# Altium PCB PCB1.PcbDoc
Units mm, origin at the board's own origin, x right, y up, seen from the top; angles counter-clockwise.
Board outline 43.18 x 56.78 mm, 4 copper layers (Top Layer, GND, VCC, Bottom Layer), stack 0.603 mm thick; 39 components, 39 nets, 158 pads, 64 vias.
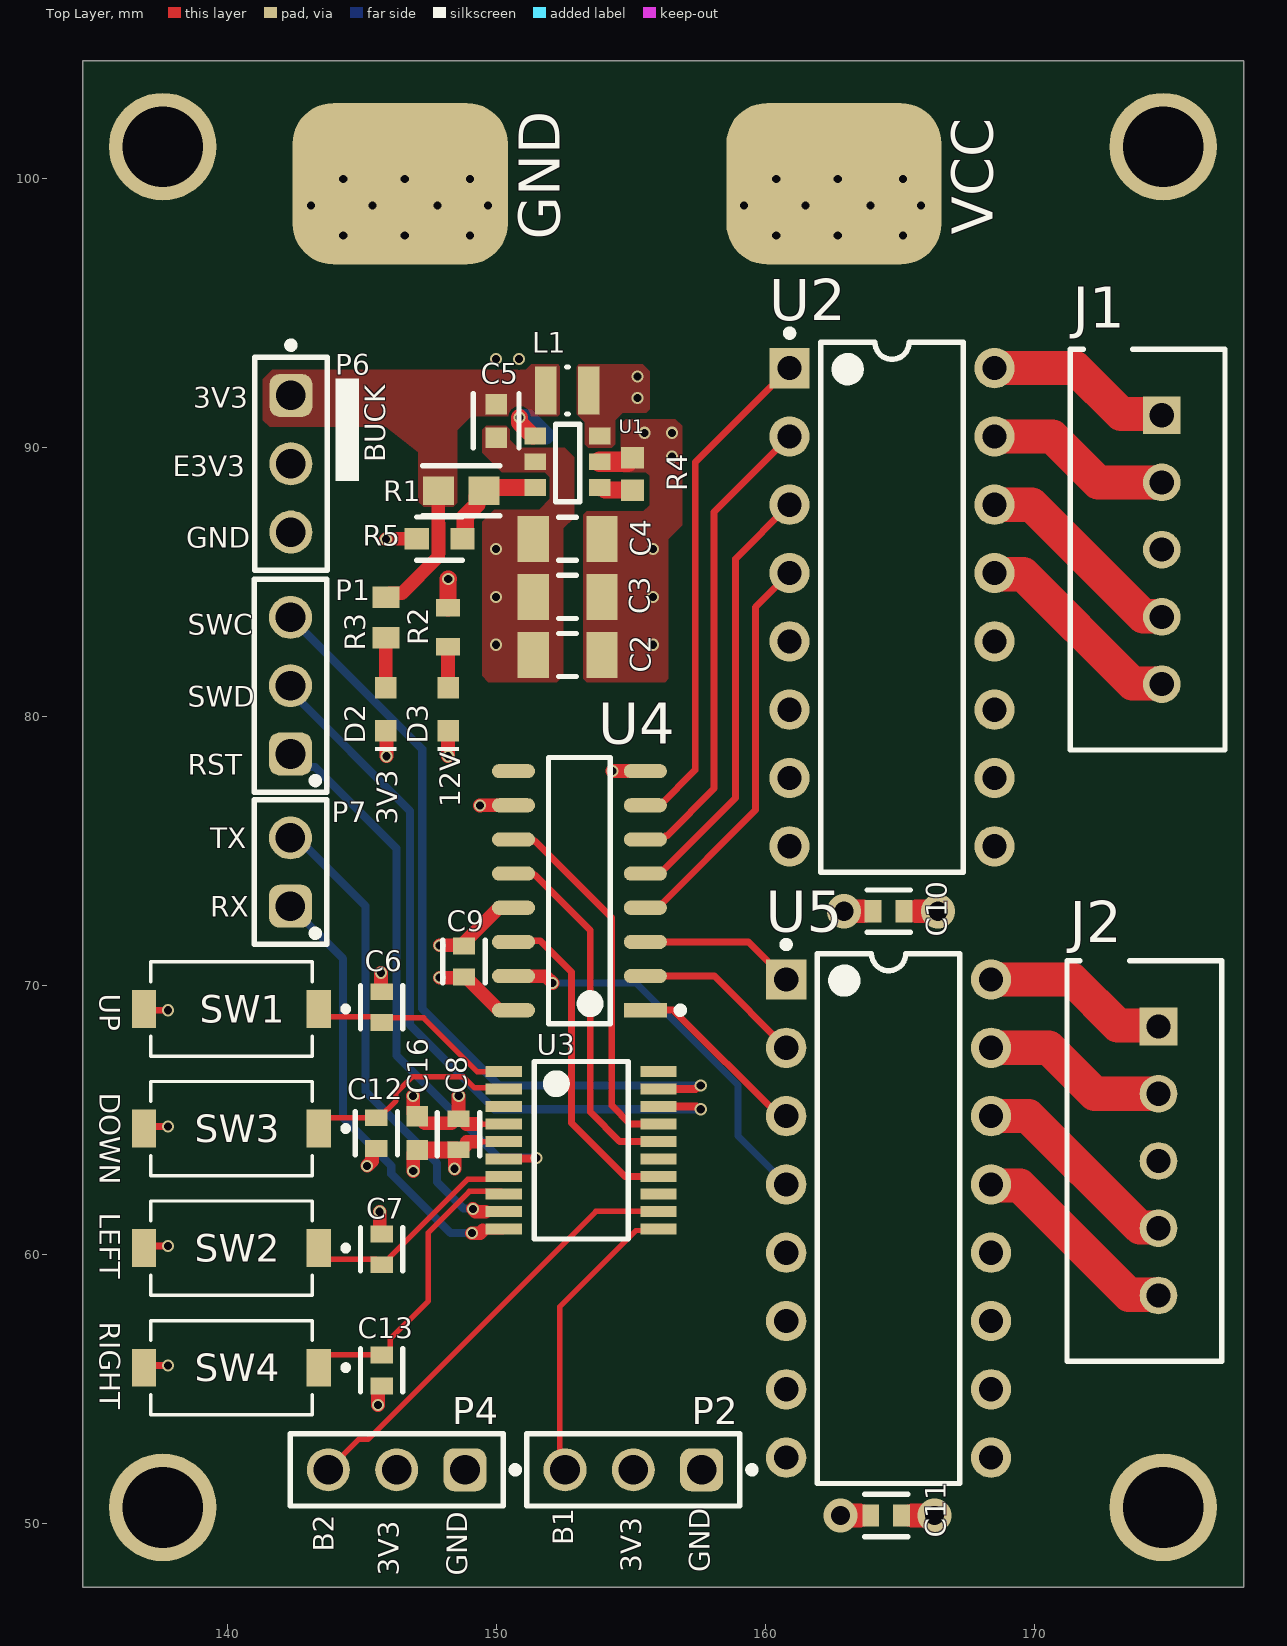
[diagram p0: Top Layer view]
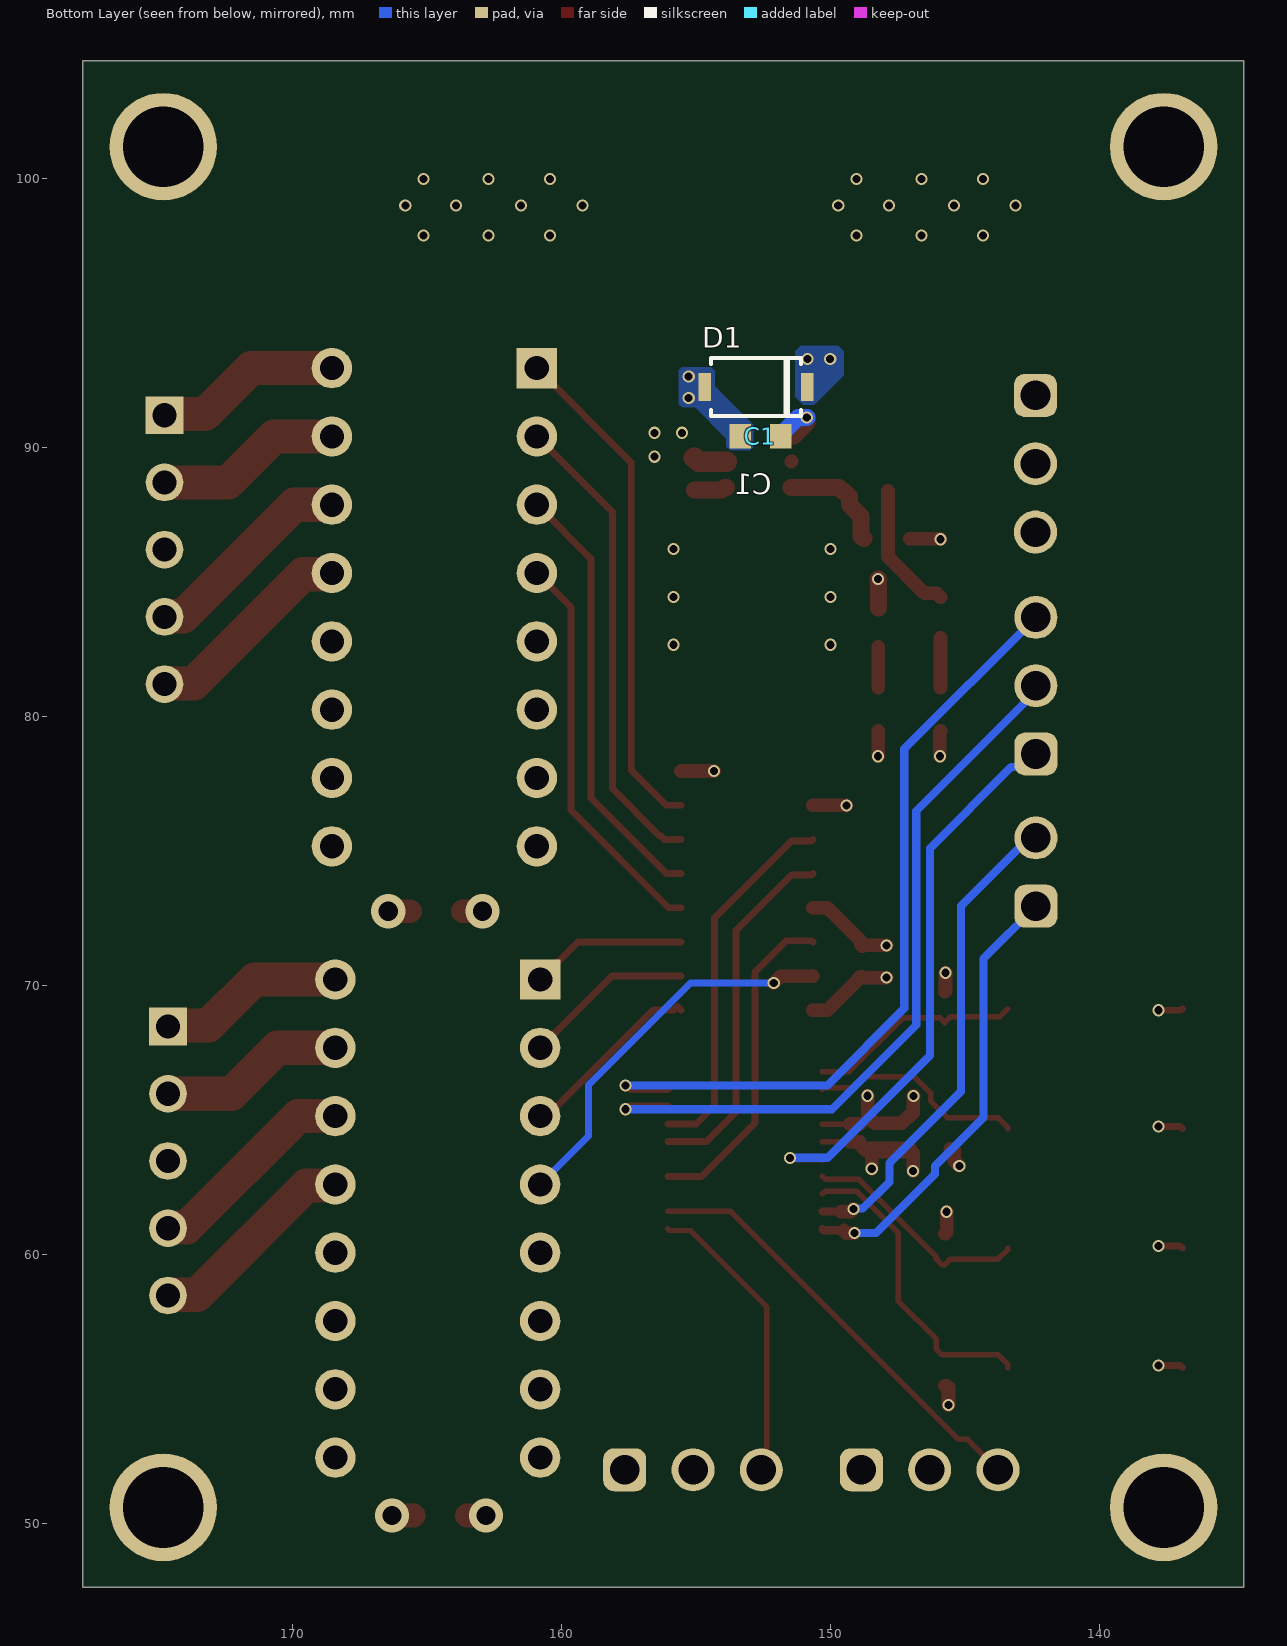
[diagram p1: Bottom Layer view, seen from below]
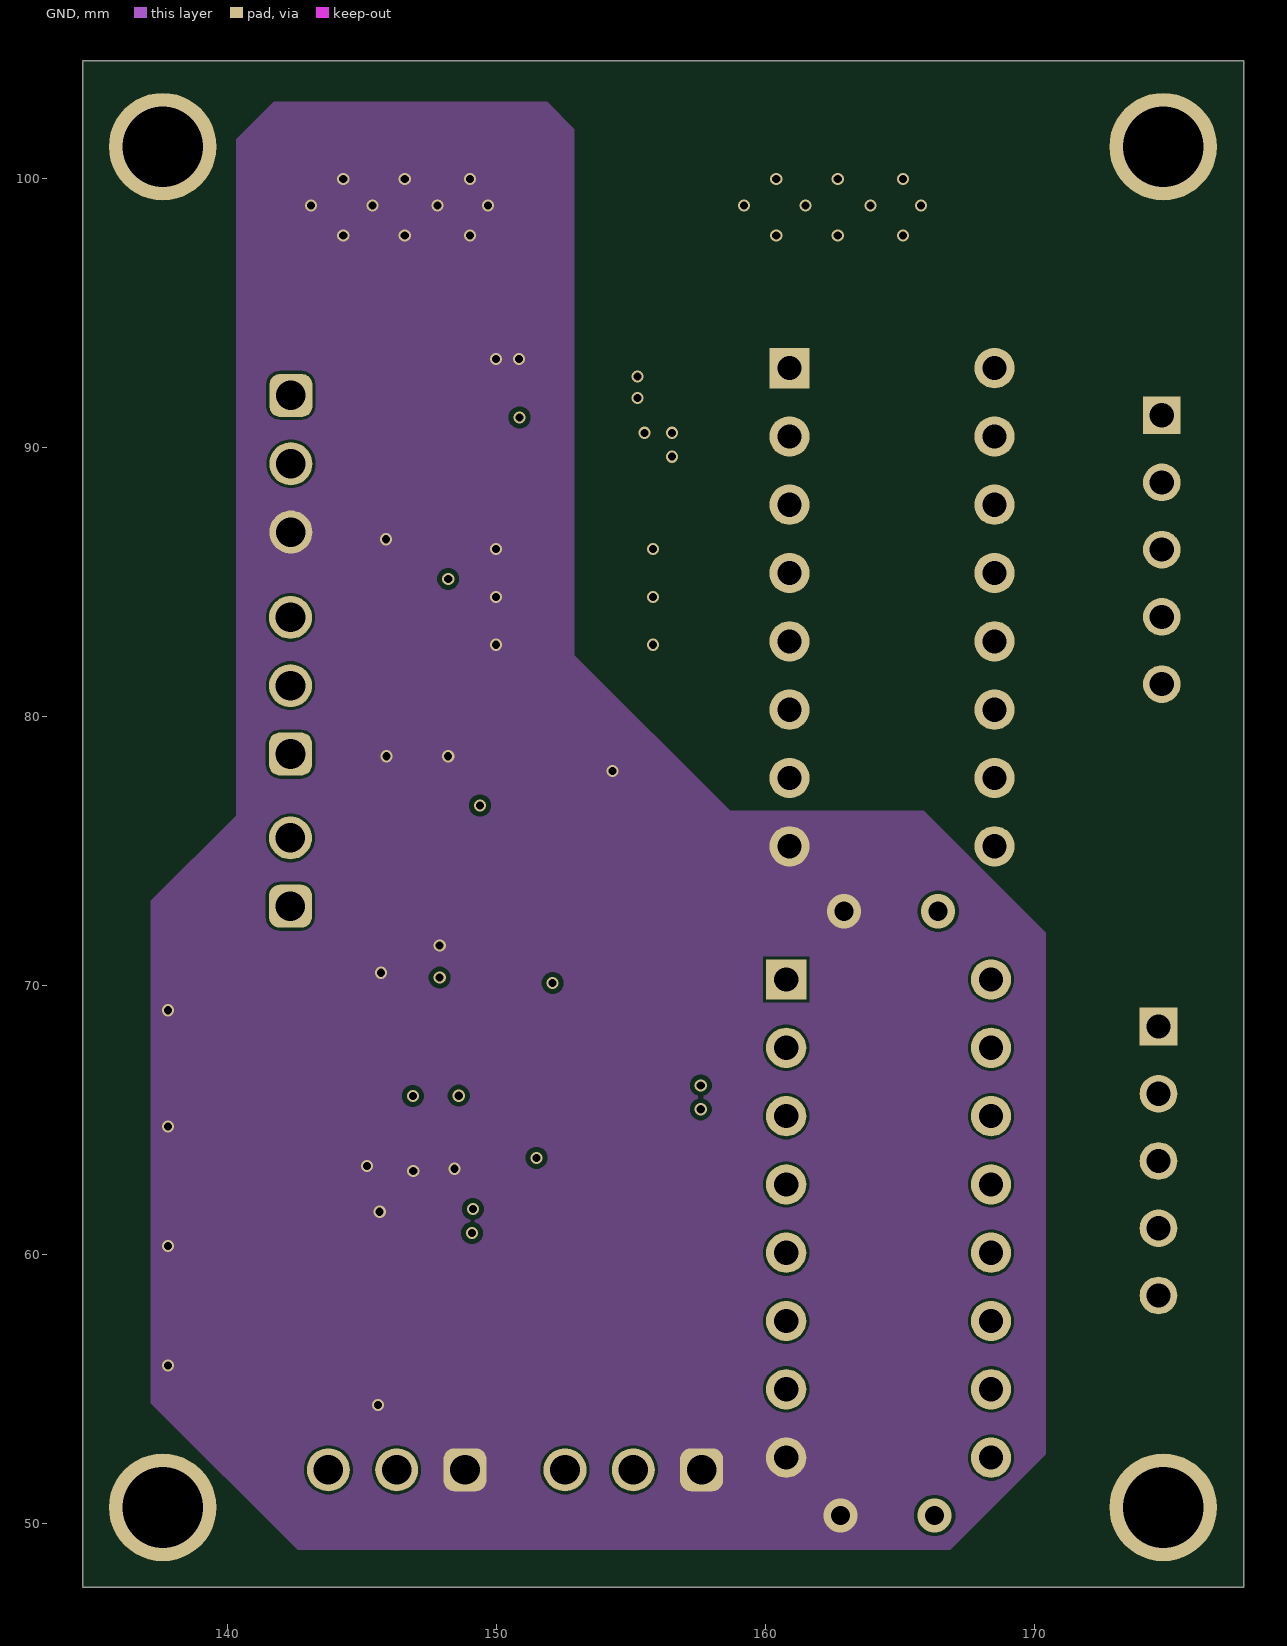
[diagram p2: GND]
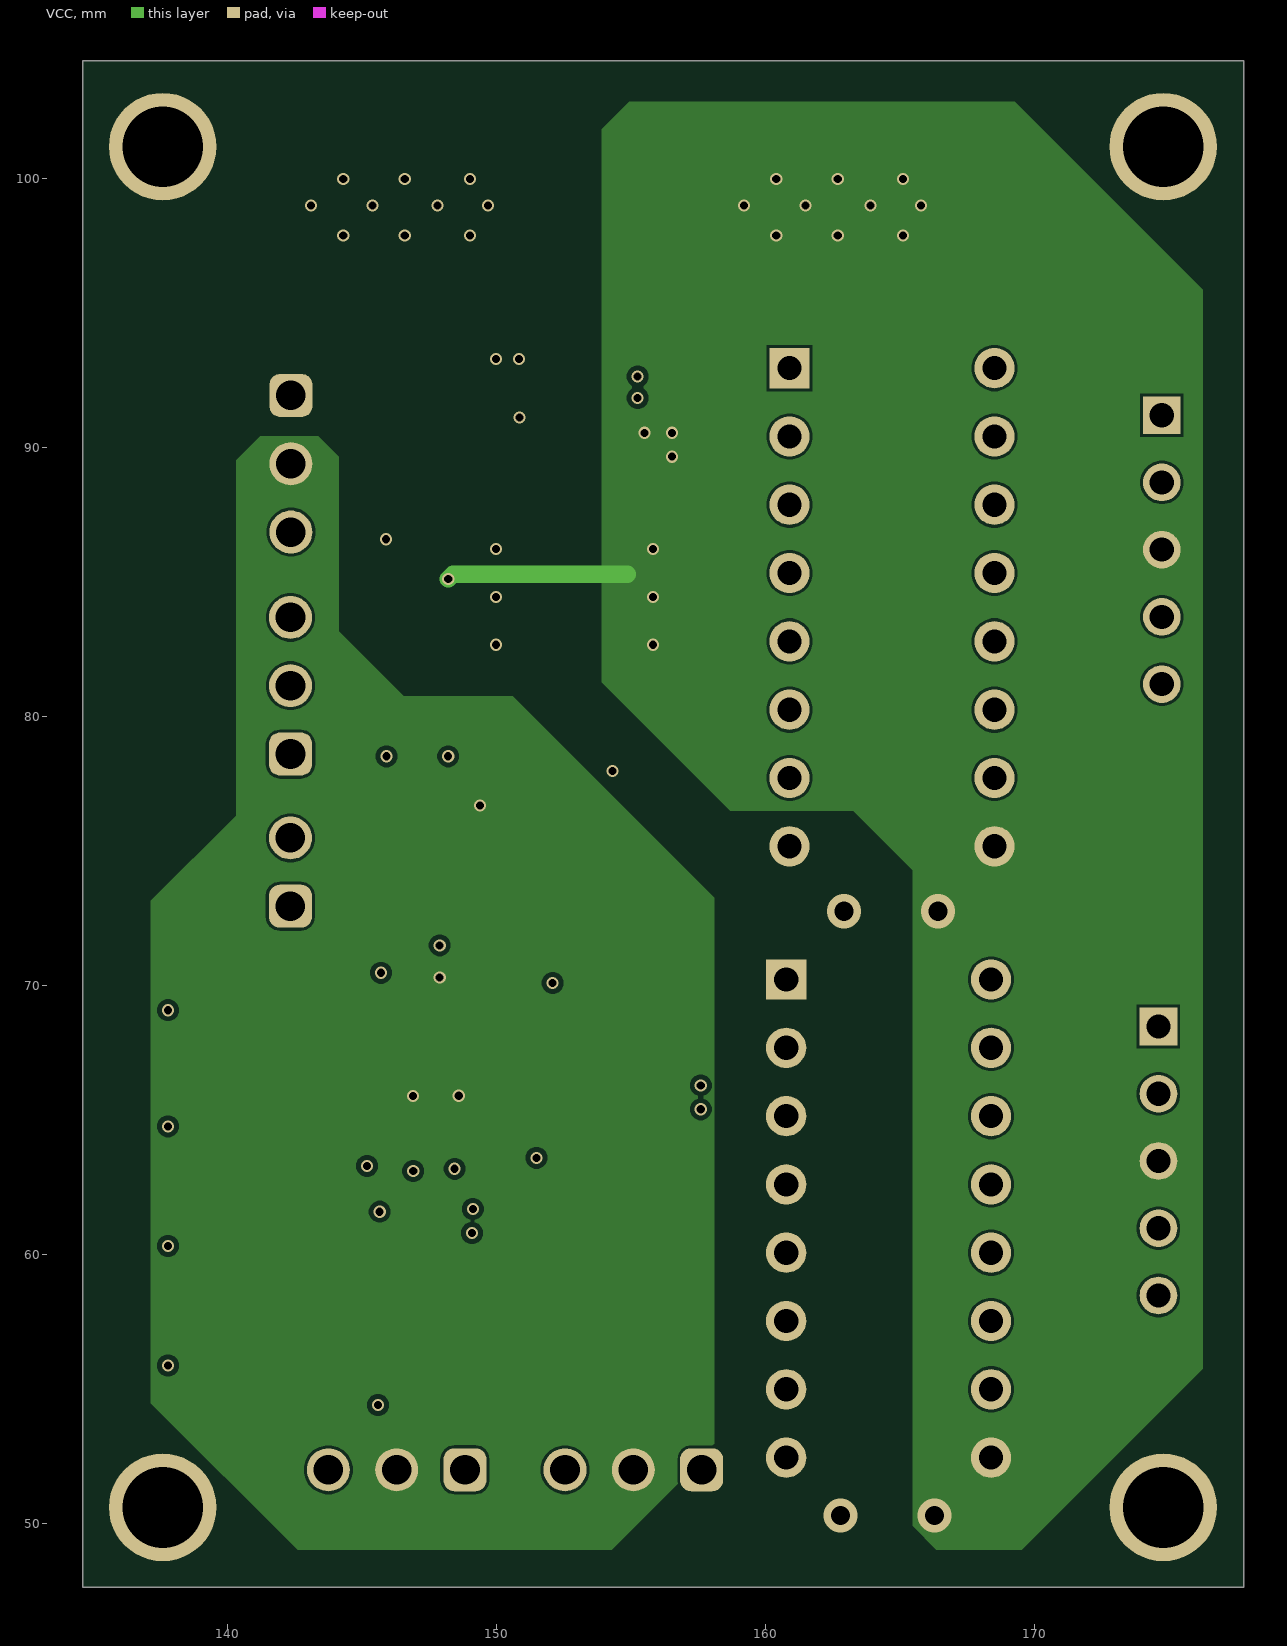
[diagram p3: VCC]
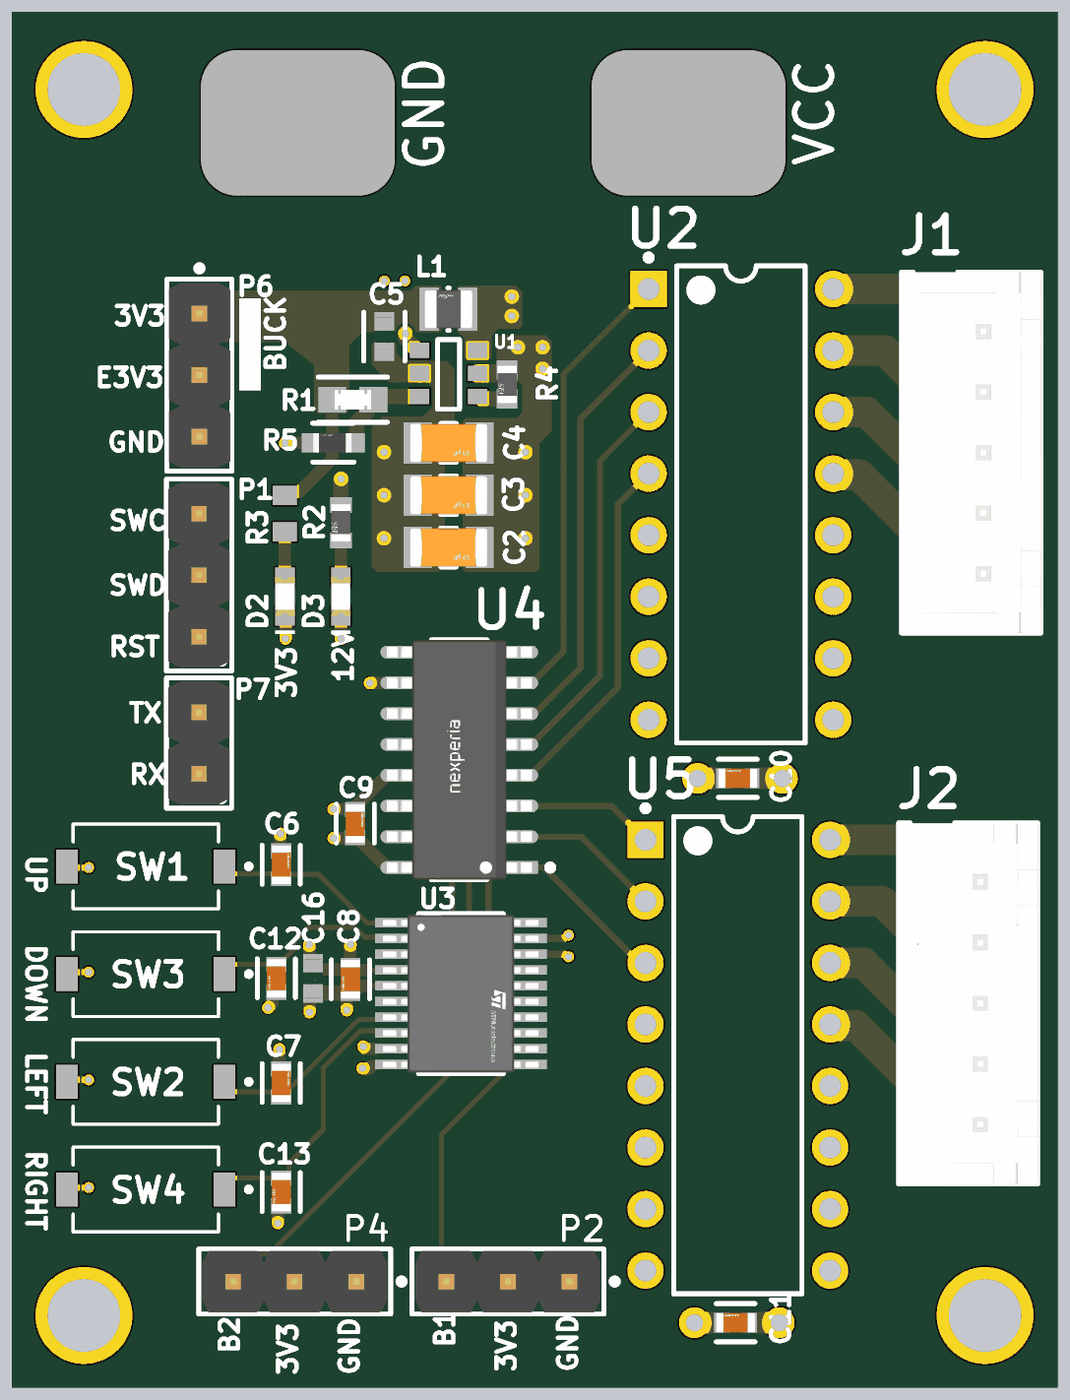
[diagram p4: 3D render of the assembled board from above, using the file's embedded part models]

## Layer stack, top to bottom
Top Solder: solder mask 0.0102, Solder Resist, Dk 3.5
Top Layer: signal copper 0.0356
Dielectric 2: prepreg 0.0711, PP-006, Dk 4.1
GND: signal copper 0.035
Dielectric 1: dielectric 0.32, FR-4, Dk 4.8
VCC: signal copper 0.035
Dielectric 3: prepreg 0.0711, PP-006, Dk 4.1
Bottom Layer: signal copper 0.0356
Bottom Solder: solder mask 0.0102, Solder Resist, Dk 3.5

## Board outline
177.8,47.625 177.8,104.4 134.62,104.4 134.62,47.625

## Design rules (kind name [scope] priority, off if disabled: settings)
BoardOutlineClearance [All] p1: gap=0.2 ignorepadtopadclearanceinfootprint=FALSE
Clearance [All] p1: gap=0.102 ignorepadtopadclearanceinfootprint=FALSE except(0.1: SMDPad-SMDPad; 0.127: Via-Fill Via-Poly Via-Region Via-Text; 0.13: THPad-Via; 0.2: Arc-Via Track-Via SMDPad-THPad SMDPad-Via; 0.23: Via-Via; 0.25: Arc-Hole Track-Hole SMDPad-Hole THPad-Hole Via-Hole Fill-Hole Poly-Hole Region-Hole Text-Hole)
ComponentClearance [All] p1: gap=0.102 collisioncheckmode=3 verticalgap=0.102 showdistances=TRUE
DiffPairsRouting [All] p1: maxlimit=0.102 minlimit=0.102 mostfreqgap=0.102 toplayer_minwidth=0.102 toplayer_maxwidth=1816.048 toplayer_prefwidth=0.102 midlayer1_minwidth=0.102 midlayer1_maxwidth=1816.048 midlayer1_prefwidth=0.102 midlayer2_minwidth=0.102 midlayer2_maxwidth=1816.048 midlayer2_prefwidth=0.102 bottomlayer_minwidth=0.102 bottomlayer_maxwidth=1816.048 bottomlayer_prefwidth=0.102 maxuncoupledlength=12.7
Height [All] p1: minheight=0 maxheight=1816.048 prefheight=12.7
HoleSize [All] p1: absolutevalues=TRUE maxlimit=6.3 minlimit=0.2 maxpercent=80.000 minpercent=20.000
HoleToHoleClearance [All] p1: gap=0.25 allowstackedmicrovias=FALSE
MinimumAnnularRing [All] p1: minimumring=0.075
MinimumSolderMaskSliver [All] p1: minsoldermaskwidth=0
PlaneClearance [All] p1: clearance=0.102
PlaneConnect PlaneConnectPowerPads [InPadClass('PowerPads')] p1: planeconnectstyle=Direct reliefexpansion=0.508 reliefentries=4 reliefconductorwidth=0.254 reliefairgap=0.254
PlaneConnect [All] p2: pad.planeconnectstyle=Relief pad.reliefexpansion=0.3 pad.reliefentries=4 pad.reliefconductorwidth=0.102 pad.reliefairgap=0.102 via.planeconnectstyle=Direct via.reliefexpansion=0.3 via.reliefentries=4 via.reliefconductorwidth=0.127 via.reliefairgap=0.127
PolygonConnect PolygonConnectPowerPads [All vs (InPadClass('PowerPads'))] p1: connectstyle=Direct reliefconductorwidth=0.254 reliefentries=4 polygonreliefangle="90 Angle" airgapwidth=0.254
PolygonConnect [All] p2: connectstyle=Direct reliefconductorwidth=0.102 reliefentries=4 polygonreliefangle="90 Angle" airgapwidth=0.102
RoutingVias [All] p1: holewidth=0.25 width=0.5 viastyle="Through Hole" minholewidth=0.2 minwidth=0.45 maxholewidth=6.3 maxwidth=6.55 useviatemplates=TRUE viatemplateguid#1={3B195AD9-307D-4968-B3D7-DF6874C8AAD2} viatemplatename#1=v45h30
SilkToSilkClearance [All] p1: silktosilkclearance=0
SilkToSolderMaskClearance [IsPad] p1: minsilkscreentomaskgap=0.102 clearancetoexposedcopper=TRUE
SolderMaskExpansion [All] p1: expansion=0.075 istentingtop=FALSE
SupplyNets "Schematic Supply Nets_2" [InNet('3.3V')] p1: voltage=0.000
SupplyNets "Schematic Supply Nets_1" [InNet('VCC')] p2: voltage=0.000
SupplyNets "Schematic Supply Nets" [InNet('GND')] p3: voltage=0.000
UnpouredPolygon [All] p1: allowshelved=TRUE
Width [All] p1: maxlimit=1816.048 minlimit=0.102 preferedwidth=0.102
19 further rules are at their usual default settings.

## Components (designator, comment, footprint, x,y, rotation, side; value= is the part's Value field where it differs from the comment)
C1 "10nF" FP-CC0603-DA-MFG 152.597,90.432 r180 bottom value="10 nF"
C2 "10uF" FP-CL31-IPC_C 152.654,82.296 r180 top
C3 "10uF" FP-CL31-IPC_C 152.654,84.455 r180 top
C4 "10uF" FP-CL31-IPC_C 152.654,86.614 r180 top
C5 "10uF" FP-CL10-IPC_C 150,91 r270 top
C6 "CL10B104JB8NNNC" FP-CL10-0_1-MFG 145.742,69.201 r90 top value=100nF
C7 "CL10B104JB8NNNC" FP-CL10-0_1-MFG 145.742,60.197 r90 top value=100nF
C8 "CL10B104JB8NNNC" FP-CL10-0_1-MFG 148.6,64.475 r270 top value=100nF
C9 "CL10B104JB8NNNC" FP-CL10-0_1-MFG 148.8,70.9 r90 top value=100nF
C10 "CL10B104JB8NNNC" FP-CL10-0_1-MFG 164.592,72.771 r180 top value=100nF
C11 "CL10B104JB8NNNC" FP-CL10-0_1-MFG 164.5,50.3 r180 top value=100nF
C12 "CL10B104JB8NNNC" FP-CL10-0_1-MFG 145.542,64.516 r270 top value=100nF
C13 "CL10B104JB8NNNC" FP-CL10-0_1-MFG 145.742,55.694 r270 top value=100nF
C16 "CL10A475KP8NNNC" FP-CL10-IPC_C 147.066,64.516 r270 top
D1 "SM5817PL-TP" SM5817PL-TP-Footprint-1 152.732,92.191 r180 bottom
D2 "150060VS75000" WL-SMCW_0603_150060xx75000 145.896,80.273 r90 top
D3 "150060VS75000" WL-SMCW_0603_150060xx75000 148.209,80.273 r90 top
J1 "B5B-XH-AM(LF)(SN)" FP-B5B-XH-AM_LF_SN-MFG 174.227,86.214 r90 top
J2 "B5B-XH-AM(LF)(SN)" FP-B5B-XH-AM_LF_SN-MFG 174.1,63.481 r90 top
L1 "2.2uH" FP-LQM2MPN_G0-MFG 152.651,92.132 r180 top
P1 "61300311121" 61300311121 142.352,81.155 r90 top
P2 "61300311121" 61300311121 155.1,52 r180 top
P4 "61300311121" 61300311121 146.3,52 r180 top
P6 "61300311121" 61300311121 142.367,89.408 r270 top
P7 "61300211121" 61300211121 142.35,74.225 r90 top
R1 "49.9k" FP-ERJ3EK-IPC_A 148.7,88.4 r180 top
R2 "RMCF0603JT620R" FP-RMCF0603-MFG 148.209,83.32 r270 top
R3 "64.9R" RESC1608X55X25ML10T15 145.896,83.693 r90 top
R4 "10k" FP-RMCF0603-IPC_C 155.067,89.027 r270 top
R5 "15.7k" FP-RT0603-MFG 147.898,86.622 r180 top value=15.8KΩ
SW1 "PTS636 SM43 SMTR LFS" "PTS636 SM43 SMTR LFS-Footprint-1" 140.154,69.134 r180 top
SW2 "PTS636 SM43 SMTR LFS" "PTS636 SM43 SMTR LFS-Footprint-1" 140.154,60.244 r180 top
SW3 "PTS636 SM43 SMTR LFS" "PTS636 SM43 SMTR LFS-Footprint-1" 140.154,64.689 r180 top
SW4 "PTS636 SM43 SMTR LFS" "PTS636 SM43 SMTR LFS-Footprint-1" 140.154,55.799 r180 top
U1 "AOZ1280CI" SOT95P280X125-6N 152.654,89.482 r0 top
U2 "ULN2003AN" N0016A 164.719,84.074 r0 top
U3 "STM32G030F6P6" FP-TSSOP20-YA-MFG 153.162,63.881 r0 top
U4 "74HC595D,118" FP-SOT109-1-IPC_C 153.095,73.533 r180 top
U5 "ULN2003AN" N0016A 164.592,61.341 r0 top

## Footprints (in the part's own frame and the unit in brackets; to place one, negate y for a bottom-side part, rotate by r counter-clockwise, add the part's x,y. Pads: shape width x height; smd on the part's side, far side on the other; paste and mask are expansions set on the pad)
61300211121 [mm] "Pin Header, pitch 2.54 mm, THT, Vertical, single row, 2p"
  rrect50% 1.6x1.6 hole 1.1: 1(-1.27,0)
  round 1.6 hole 1.1: 2(1.27,0)
  silkscreen extent -2.69,-1.35 2.69,1.35, body extent -2.54,-1.27 2.54,1.27, height 8.57
61300311121 [mm] "Pin Header, pitch 2.54 mm, THT, Vertical, single row, 3p"
  rrect50% 1.6x1.6 hole 1.1: 1(-2.54,0)
  round 1.6 hole 1.1: 2(0,0) 3(2.54,0)
  silkscreen extent -3.96,-1.35 3.96,1.35, body extent -3.81,-1.27 3.81,1.27, height 8.57
FP-B5B-XH-AM_LF_SN-MFG [mm]
  rect 1.4x1.4 hole 0.9 paste-2539.97 mask+0: 1(5,-0.525)
  round 1.4 hole 0.9 paste-2539.97 mask+0: 2(2.5,-0.525) 3(0,-0.525) 4(-2.5,-0.525) 5(-5,-0.525)
  silkscreen extent -7.45,-2.88 7.45,2.88, body extent -7.55,-2.98 7.55,2.98, height 0.25
FP-CC0603-DA-MFG [mm]
  rect 0.8x0.9 smd paste+0 mask+0: 1(-0.75,0) 2(0.75,0)
  body extent -0.8,-0.4 0.8,0.4, height 0.9
FP-CL10-0_1-MFG [mm]
  rect 0.625x0.825 smd paste+0 mask+0: 1(-0.575,0) 2(0.575,0)
  silkscreen extent -0.8,-0.79 0.8,0.79, body extent -0.99,-0.55 0.99,0.55, height 0.25
FP-CL10-IPC_C [mm]
  rect 0.758x0.812 smd paste+0 mask+0: 1(-0.627,0) 2(0.627,0)
  silkscreen extent -1.01,-0.85 1.01,0.85, body extent -1.11,-0.55 1.11,0.55, height 0.25
FP-CL31-IPC_C [mm]
  rect 1.154x1.706 smd paste+0 mask+0: 1(-1.276,0) 2(1.276,0)
  silkscreen extent -0.32,-0.8 0.32,0.8, body extent -1.95,-1 1.95,1, height 0.25
FP-ERJ3EK-IPC_A [mil]
  rect 45.53x41.82 smd paste+0 mask+0: 1(-33.5,0) 2(33.5,0)
  silkscreen extent -56,-37 56,37, body extent -76,-41 76,41, height 10
FP-LQM2MPN_G0-MFG [mm]
  rect 0.8x1.8 smd paste+0 mask+0: 1(-0.8,0) 2(0.8,0)
  silkscreen extent -0.03,-0.87 0.03,0.87, body extent -1.3,-1 1.3,1, height 0.25
FP-RMCF0603-IPC_C [mm]
  rect 0.806x0.858 smd paste+0 mask+0: 1(-0.601,0) 2(0.601,0)
  body extent -1.1,-0.58 1.1,0.58, height 0.25
FP-RMCF0603-MFG [mm]
  rect 0.65x0.9 smd paste+0 mask+0: 1(-0.725,0) 2(0.725,0)
  body extent -1.15,-0.58 1.15,0.58, height 0.25
FP-RT0603-MFG [mm]
  rect 0.9x0.8 smd paste+0 mask+0: 1(-0.85,0) 2(0.85,0)
  silkscreen extent -0.85,-0.81 0.86,0.8, body extent -1.4,-0.55 1.4,0.55, height 0.25
FP-SOT109-1-IPC_C [mm]
  rect 1.604x0.528 smd paste+0 mask+0: 1(-2.451,4.445)
  rrect100% 1.604x0.528 smd paste+0 mask+0: 2(-2.451,3.175) 3(-2.451,1.905) 4(-2.451,0.635) 5(-2.451,-0.635) 6(-2.451,-1.905) 7(-2.451,-3.175) 8(-2.451,-4.445) 9(2.451,-4.445) 10(2.451,-3.175) 11(2.451,-1.905) 12(2.451,-0.635) 13(2.451,0.635) 14(2.451,1.905) 15(2.451,3.175) 16(2.451,4.445)
  silkscreen extent -3.88,-4.95 1.15,4.95, body extent -3.35,-5.05 3.35,5.05, height 0.25
FP-TSSOP20-YA-MFG [mm]
  rect 1.35x0.4 smd paste+0 mask+0: 1(-2.875,2.925) 2(-2.875,2.275) 3(-2.875,1.625) 4(-2.875,0.975) 5(-2.875,0.325) 6(-2.875,-0.325) 7(-2.875,-0.975) 8(-2.875,-1.625) 9(-2.875,-2.275) 10(-2.875,-2.925) 11(2.875,-2.925) 12(2.875,-2.275) 13(2.875,-1.625) 14(2.875,-0.975) 15(2.875,-0.325) 16(2.875,0.325) 17(2.875,0.975) 18(2.875,1.625) 19(2.875,2.275) 20(2.875,2.925)
  silkscreen extent -1.75,-3.3 1.75,3.3, body extent -3.65,-3.55 3.65,3.55, height 0.25
N0016A [mm] "DIP, 16-Leads, Body 19.7x6.6mm, Pitch 2.54mm"
  rect 1.5x1.5 hole 0.9: 1(-3.81,8.89)
  round 1.5 hole 0.9: 2(-3.81,6.35) 3(-3.81,3.81) 4(-3.81,1.27) 5(-3.81,-1.27) 6(-3.81,-3.81) 7(-3.81,-6.35) 8(-3.81,-8.89) 9(3.81,-8.89) 10(3.81,-6.35) 11(3.81,-3.81) 12(3.81,-1.27) 13(3.81,1.27) 14(3.81,3.81) 15(3.81,6.35) 16(3.81,8.89)
  silkscreen extent -3.93,-9.85 2.65,10.31, body extent -3.95,-9.85 3.95,9.85, height 5.08
"PTS636 SM43 SMTR LFS-Footprint-1" [mm]
  rect 0.9x1.4 smd: 1(-3.25,0) 2(3.25,0)
  silkscreen extent -4.35,-1.75 3,1.75
RESC1608X55X25ML10T15 [mm] "Chip Resistor, 2-Leads, Body 1.60x0.80mm, IPC Low Density"
  rect 0.8x1 smd: 1(-0.75,0) 2(0.75,0)
  body extent -0.85,-0.45 0.85,0.45, height 0.55
SM5817PL-TP-Footprint-1 [mil]
  rect 18x41 smd paste+0 mask+0: 1(-76,3) 2(74,3)
  silkscreen extent -67,-40 65,46
SOT95P280X125-6N [mm] "SOT23, 6-Leads, Body 2.90x2.80mm, Pitch 0.95mm, IPC Medium Density"
  rect 0.8x0.63 smd: 1(-1.2,0.95) 2(-1.2,0) 3(-1.2,-0.95) 4(1.2,-0.95) 5(1.2,0) 6(1.2,0.95)
  silkscreen extent -0.45,-1.48 0.45,1.4, body extent -0.85,-1.55 0.85,1.55, height 1.25
WL-SMCW_0603_150060xx75000 [mm] "SMD Mono-color Chip LED, body 1.6x0.8mm"
  rect 0.8x0.8 smd: 1(-0.8,0) 2(0.8,0)
  silkscreen extent -1.55,-0.4 -1.4,0.4, body extent -0.8,-0.4 0.8,0.4, height 0.7

## Part data
C1: library part CMP-2100-03600-2, "CAP CER 10000PF 50V X7R 0603", Capacitance="10 nF", Manufacturer=YAGEO, Manufacturer Part Number=CC0603KRX7R9BB103, Package=CC0603-DA, Temperature="-55°C to +125°C", Temperature Characteristic=X7R, Temperature Coefficient=15%, Temperature Range High=+125°C, Temperature Range Low=-55°C, Tolerance=0.1, Voltage="50 V", Automotive=No, Category=Cap, ComponentLink2Description=Datasheet, ComponentLink2URL=http://www.yageo.com/documents/recent/UPY-GPHC_X7R_6.3V-to-50V_18.pdf, Device Class L1="Passive Components", Device Class L2=Capacitors, Device Class L3="Ceramic Capacitors", Digikey Description="CAP CER 10000PF 50V X7R 0603", Footprint Url=http://www.yageo.com/exep/pages/download/literatures/UPY-C_GEN_24.pdf, Height=0.9mm, Lead Free=Yes, Material=Ceramic, Mouser Description="Multilayer Ceramic Capacitor, CC Series, 0.01 - F, - 10%, X7R, 50 V, 0603 [1608 Metric]", Octopart=https://octopart.com/cc0603krx7r9bb103-yageo-192938, RoHS=TRUE, Voltage Rating="50 V"
C2 C3 C4: library part CMP-13271-000016-1, "CAP CER 10UF 50V X5R 1206", Manufacturer=Samsung, Manufacturer Part Number=CL31A106KBHNNNE, Package=CL31, Temperature="-55°C to +85°C", Temperature Characteristic=X5R, Temperature Coefficient=15%, Temperature Range High=+85°C, Temperature Range Low=-55°C, Tolerance=10%, Voltage=50V, Automotive=No, Capacitance=10uF, Category=Cap, ComponentLink2Description=Datasheet, ComponentLink2URL=http://www.samsungsem.com/kr/support/product-search/mlcc/__icsFiles/afieldfile/2018/06/21/CL31A106KBHNNNE.pdf, Device Class L1="Passive Components", Device Class L2=Capacitors, Device Class L3="Ceramic Capacitors", Digikey Description="CAP CER 10UF 50V X5R 1206", Height=1.8mm, Ipc Land Pattern Name=CAPC320160X160, Lead Free=Yes, Material=Ceramic, Octopart=https://octopart.com/cl31a106kbhnnne-samsung-19832778, RoHS=TRUE, Voltage Rating=50V
C5: library part CMP-13271-001938-1, "Cap Ceramic 10uF 6.3V X5R ±20% Pad SMD 0603 +85°C T/R", Case Code (Imperial)=0603, Case Code (Metric)=1608, Dielectric=X5R, Max Operating Temperature=85°C, Min Operating Temperature=-55°C, Package Quantity=1, Tolerance=20%, Voltage=6.3V, Capacitance=10uF, Case/Package=0603, Contact Plating=Tin, Depth=0.8mm, Height=0.8mm, Length=1.6mm, Mount="Surface Mount", Packaging="Tape and Reel", Radiation Hardening=No, Thickness=0.035inch, Voltage Rating=6.3V, Width=0.031inch
C6 C7 C8 C9 C10 C11 C12 C13: library part CMP-13271-000011-1, "CAP CER 0.1UF 50V X7R 0603", Capacitance=100nF, Manufacturer="Samsung Electro-Mechanics America, Inc", Package=CL10-0.1, Temperature="-55°C to +125°C", Temperature Characteristic=X7R, Temperature Coefficient=15%, Temperature Range High=+125°C, Temperature Range Low=-55°C, Tolerance=5%, Voltage Rating=50V, Automotive=No, Category=Cap, ComponentLink2Description=Datasheet, ComponentLink2URL=http://www.samsungsem.com/kr/support/product-search/mlcc/__icsFiles/afieldfile/2019/06/18/CL10B104JB8NNNC-19.pdf, Device Class L1="Passive Components", Device Class L2=Capacitors, Device Class L3="Ceramic Capacitors", Digikey Description="CAP CER 0.1UF 50V X7R 0603", Height=0.9mm, Ipc Land Pattern Name=CAPC16080X80, Lead Free=Yes, Manufacturer Part Number=CL10B104JB8NNNC, Material=Ceramic, Octopart=https://octopart.com/cl10b104jb8nnnc-samsung-9302151, RoHS=TRUE
C16: library part CMP-13271-003017-1, "Cap Ceramic 4.7uF 10V X5R ±10% Pad SMD 0603 +85°C T/R", Capacitance=4.7uF, Case Code (Imperial)=0603, Case Code (Metric)=1608, Dielectric=X5R, Max Operating Temperature=85°C, Min Operating Temperature=-55°C, Package Quantity=1, Tolerance=10%, Voltage Rating=10V, Case/Package=0603, Contact Plating=Tin, Depth=0.8mm, Height=0.8mm, Length=1.6mm, Mount="Surface Mount", Packaging="Tape and Reel", Radiation Hardening=No, Thickness=0.035inch, Width=0.031inch
D1: library part CMP-020-000001-3, "DIODE SCHOTTKY 20V 1A SOD123FL"
D2 D3: library part CMP-1426-00006-6, Case Code (Imperial)=0603, Case Code (Metric)=1608, Color=Green, Forward Current=100mA, Forward Voltage=2V, Max Junction Temperature (Tj)=95°C, Max Operating Temperature=85°C, Max Reverse Voltage (DC)=5V, Min Operating Temperature=-40°C, Power Dissipation=72mW, Test Current=20mA, Case/Package=0603, Dominant Wavelength=570nm, Height=700µm, Length=1.6mm, Lens Style="Clear, Rectangular", Luminous Intensity=40mcd, Mount="Surface Mount", NexarPartId=29717778, Number of Pins=2, Packaging="Tape and Reel", Peak Wavelength=572nm, REACH SVHC=Unknown, Reverse Voltage=5V, RoHS=Compliant, Viewing Angle=140°, Wavelength=570nm, Width=800µm
J1 J2: library part CMP-17439-000304-1, "CONN HEADER VERT 5POS 2.5MM", Color=Green, Contact Resistance=20mR, Flammability Rating="UL94 V-0", Housing Color=White, Insulation Color=Natural, Max Current Rating=3A, Max Operating Temperature=85°C, Max Voltage Rating (AC)=250V, Min Operating Temperature=-25°C, Connector Type=Header, Contact Finish - Mating=TIN, Contact Material=Brass, Contact Plating=Copper, Contact Shape=Square, Contact Type="Male Pin", Depth=5.75mm, Fastening Type=Detent, Housing Material=Polyamide, Insulation Material=Nylon, Lead Free="Lead Free", Length=14.9mm, Mated Stacking Heights=9.8mm, Mount="Through Hole", Number of Positions=5, Number of Rows=1, Orientation=Straight, Packaging=Bulk, Pitch=2.5mm, Series=XH, Termination=Solder, Voltage Rating=250V
L1: library part CMP-06042-016770-1, "Multilayer Type Inductor for Power Lines, 0806 (2016), 2.2μH, 30%, 0.138Ω, 1.2A", Case Code (Imperial)=0806, Case Code (Metric)=2016, Current Rating=1.2A, DC Resistance (DCR)=138mR, Inductance Tolerance=30%, Max Operating Temperature=125°C, Min Operating Temperature=-55°C, Package Quantity=1, Self Resonant Frequency=40MHz, Test Frequency=1MHz, Case/Package=0806, Core Material=Ferrite, DC Current=1.2A, Depth=1.75mm, Height=1mm, Height - Seated (Max)=0.039inch, Inductance=2.2uH, Lead Free="Lead Free", Length=0.079inch, Max DC Current=1.2A, Military Standard=Not, Mount="Surface Mount", Packaging="Tape and Reel", Radiation Hardening=No, REACH SVHC="No SVHC", RoHS Compliant=Yes, Series=LQM2MPN_G0, Shielding=Shielded, Termination=SMD/SMT, Tolerance=30%, Width=0.063inch
P1 P2 P4 P6: library part CMP-1502-01062-3, Color=Black, Contact Resistance=20mΩ, Current Rating=3A, Max Operating Temperature=105°C, Min Operating Temperature=-40°C, Operating Supply Voltage=250V, Connector Type="Male Pin", Contact Material=Copper, Contact Mating Length=5.9944mm, Contact Plating=Gold, Gender=Male, Height=8.94mm, Lead Free="Lead Free", Lead Pitch=2.54mm, Mount="Through Hole", NexarPartId=32855521, Number of Contacts=3, Number of Pins=3, Number of Positions=3, Number of Rows=1, Orientation=Vertical, Packaging=Bulk, Pitch=2.54mm, REACH SVHC=Unknown, RoHS=Compliant, Termination=Solder, Voltage Rating=250V
P7: library part CMP-1712-00002-6, Color=Black, Contact Resistance=20mΩ, Current Rating=3A, Max Operating Temperature=125°C, Min Operating Temperature=-40°C, Operating Supply Voltage=250V, Connector Type="Male Pin", Contact Gender=Male, Contact Material=Copper, Contact Mating Length=5.9944mm, Contact Plating=Gold, Gender=Male, Height=8.94mm, Housing Material=PBT, Lead Free="Lead Free", Lead Pitch=2.54mm, Mount="Through Hole", NexarPartId=20081794, Number of Contacts=2, Number of Pins=2, Number of Positions=2, Number of Rows=1, Orientation=Vertical, Packaging=Bulk, Pitch=2.54mm, REACH SVHC="No SVHC", RoHS=Compliant, Termination="Through Hole", Voltage Rating=250V
R1: library part CMP-2000-00536-2, "RES SMD 49.9K OHM 1% 1/10W 0603", Case Code (Imperial)=0603, Case Code (Metric)=1608, Max Operating Temperature=155°C, Max Power Dissipation=100mW, Min Operating Temperature=-55°C, Package Quantity=1, Resistance=49.9kR, Resistance Tolerance=1%, Resistor Type="Thick Film", Temperature Coefficient=100ppm/°C, Voltage Rating=75V, Voltage Rating (DC)=50V, Case/Package=0603, Construction=Rectangular, Contact Plating=Tin, Depth=0.8mm, Features="Automotive AEC-Q200", Height=0.45mm, Lead Free="Lead Free", Length=1.6mm, Military Standard=Not, Mount="Surface Mount", Number of Terminations=2, Packaging="Tape and Reel", Power Rating=100mW, Radiation Hardening=No, REACH SVHC="No SVHC", RoHS Compliant=Yes, Series=ERJ, Size Code=0603, Technology="THICK FILM", Termination=SMD/SMT, Tolerance=1%, Weight=7.1E-05oz, Width=0.8mm
R2: library part CMP-26527-007271-1, "620Ω ±5% 0.1W 0603 Thick Film Chip Resistor AEC-Q200 compliant", Case Code (Imperial)=0603, Case Code (Metric)=1608, Max Operating Temperature=155°C, Max Power Dissipation=100mW, Min Operating Temperature=-55°C, Resistance=620R, Resistor Type="Thick Film", Temperature Coefficient=200ppm/°C, Tolerance=5%, Case/Package=0603, Contact Plating=Tin, Features="Automotive AEC-Q200", Height=0.022inch, Lead Free="Lead Free", Length=0.061inch, Mount="Surface Mount", Number of Terminations=2, Packaging="Tape and Reel", Power Rating=100mW, Radiation Hardening=No, RoHS Compliant=Yes, Series=RMCF, Size Code=0603, Width=0.031inch
R3: library part CMP-2000-04108-1, "RES 64.9 OHM 1% 1/10W 0603", Manufacturer=Yageo, Part Number=RC0603FR-0764R9L
R4: library part CMP-26527-002098-1, "10kΩ ±5% 0.1W 0603 Thick Film Chip Resistor AEC-Q200 compliant", Case Code (Imperial)=0603, Case Code (Metric)=1608, Max Operating Temperature=155°C, Max Power Dissipation=100mW, Min Operating Temperature=-55°C, Resistance=10kR, Resistor Type="Thick Film", Temperature Coefficient=100ppm/°C, Tolerance=5%, Case/Package=0603, Construction=Rectangular, Contact Plating=Tin, Depth=0.8mm, Features="Automotive AEC-Q200", Height=0.022inch, Lead Free="Lead Free", Length=1.55mm, Military Standard=Not, Mount="Surface Mount", Number of Terminations=2, Packaging="Tape and Reel", Power Rating=100mW, Radiation Hardening=No, Series=RMCF, Size Code=0603, Width=0.031inch
R5: library part CMP-03412-026559-1, "RES SMD 15.8K OHM 0.1% 1/10W", Manufacturer=Yageo, Manufacturer Part Number=RT0603BRD0715K8L, Package=RT0603, Power Rating=0.1W, Resistance=15.8KΩ, Temperature="-55°C to +155°C", Temperature Coefficient="25 ppm/°C", Temperature Range High=+155°C, Temperature Range Low=-55°C, Tolerance=0.001, Voltage Rating=75V, Automotive=No, Category=Res, ComponentLink2Description=Datasheet, ComponentLink2URL=http://www.yageo.com/documents/recent/PYu-RT_1-to-0.01_RoHS_L_9.pdf, Composition="Thin Film", Device Class L1="Passive Components", Device Class L2=Resistors, Device Class L3="Chip SMD Resistors", Digikey Description="RES SMD 15.8K OHM 0.1% 1/10W", Footprint Url=http://www.yageo.com/exep/pages/download/literatures/PYu-R_Mount_10.pdf, Height=0.55mm, Ipc Land Pattern Name=RESC16080X45, Lead Free=Yes, Mouser Description="Thin Film Resistors 1/10W 15.8K ohm .1% 25ppm", Octopart=https://octopart.com/rt0603brd0715k8l-yageo-1418310, RoHS=TRUE, Series=RT
SW1 SW2 SW3 SW4: library part CMP-014-000005-2, "SWITCH TACTILE SPST-NO 0.05A 12V"
U1: library part CMP-002-000004-2, "Buck Switching Regulator IC Positive Adjustable 0.8V 1 Output 1.2A SOT-23-6"
U2 U5: library part CMP-2000-07352-1, "High-Voltage, High-Current Darlington Transistor Array, 50 V, 500 mA, -20 to 70 degC, 16-Pin PDIP (N), Pb-Free (RoHS), Tube", Manufacturer=TexasInstruments, Maximum Collector Emitter Saturation Voltage=1.1@100mA, Maximum Collector Emitter Voltage=50V, Package=16PDIP, Package Description="16-Pin Plastic In-Line, Body 19.305 x 6.35 mm, Pitch 2.54 mm", Package Reference=N16, Package Version="4040049/E, 12/2002", Peak DC Collector Current=0.5A, Category=DarlingtonBJT, Configuration=Array7, Datasheet URL=http://www.ti.com/general/docs/lit/getliterature.tsp?genericPartNumber=uln2003a&fileType=pdf, Datasheet Version="Rev. O, 01/2016", Manufacturer URL=http://www.ti.com/, Mounting=ThroughHole, Mounting Technology=ThroughHole, Package URL=http://www.ti.com/litv/pdf/mpdi002c, Packaging=Rail/Tube, Rad Hard=No, Type=NPN
U3: library part CMP-12105-000034-1, "ARM MICROCONTROLLERS - MCU", Ambient Temperature Range High=+85°C, Ambient Temperature Range Low=-40°C, Frequency=64MHz, Manufacturer=STMicroelectronics, Max Junction Temp=+105°C, Max Supply Voltage=3.6V, Min Supply Voltage=2V, Package=TSSOP20-YA, Temperature="-40°C to +85°C", Automotive=No, Category=IC, ComponentLink2Description=Datasheet, ComponentLink2URL=https://www.st.com/resource/en/datasheet/stm32g030f6.pdf, Core Architecture="ARM Cortex-M0+", Data Bus Width=32bits, Device Class L1="Integrated Circuits (ICs)", Device Class L2="Embedded Processors and Controllers", Device Class L3=Microcontrollers, Digikey Description="ARM MICROCONTROLLERS - MCU", Height=1.2mm, Interface=I2C,SPI,USART,LIN,IrDA,I2S,SMBus, Lead Free=Yes, Manufacturer Part Number=STM32G030F6P6, Memory Size=32KBytes, Memory Type=FLASH, Number Of A/D Converters=1, Number Of Adc Channels=16, Number Of Cores=1, Number Of I2C Channels=2, Number Of I/Os=17, Number Of Pwm Channels=11, Number Of Spi Channels=3, Number Of Timers/Counters=6, Number Of Uart Channels=2, Octopart=https://octopart.com/stm32g030f6p6-stmicroelectronics-103773023, Ram Size=8KBytes, RoHS=TRUE, Standoff Height=0.05mm, Temperature Range High=+85°C, Temperature Range Low=-40°C
U4: library part CMP-14351-000006-1, "IC SHIFT REGISTER 8BIT 16SOIC", RoHS Compliant=Yes

## Free pads (board coordinates)
  rrect50% 8x6 smd: 4(146.431,99.822) 4(162.56,99.822)
  round 4 hole 3: MH(137.6,50.6) MH(137.6,101.2) MH(174.8,50.6) MH(174.8,101.2)

## Via types
v1: diameter 0.45, hole 0.3, Top Layer to Bottom Layer, 60 vias
v2: diameter 1.27, hole 0.711, Top Layer to Bottom Layer, 4 vias

## Nets (pads, with @x,y where several pads share a name; then routed paths per layer and width w, separated by ;. In a path a pad name is that pad's centre, name@x,y a point inside that pad or via, vN(x,y) a via of type N, cw(c..) or ccw(c..) an arc to the next point about the centre after c; other vN are vias at no path point)
3.3V: C5.1 C8.1 C9.1 C16.1 L1.2 P2.2 P4.2 P6.1 P6.2 R1.2 R3.2 U3.4 U4.10 U4.16 | length 14.2
  Top Layer w0.203: 149.272,64.856 U3.4
  Top Layer w0.508: R3.2 146.042,84.589 146.489,84.589 147.849,85.949 147.849,86.07 147.854,86.075 147.854,87.169 147.849,87.174 R1.2 ; v1(146.9,65.9) 146.914,65.886 146.914,65.268 147.039,65.143 C16.1 ; C16.1@147.093,65.143 147.355,64.881 148.331,64.881 148.441,64.991 148.541,64.991 C8.1 ; v1(147.9,70.3) 148.775,70.3 C9.1 148.9,70.325 148.959,70.266 148.959,70.235 150.106,69.088 U4.16 ; C8.1@148.6,65.202 148.6,65.9 v1(148.608,65.908) ; C8.1@148.894,64.856 149.272,64.856 ; v1(149.4,76.7) 149.404,76.704 150.64,76.704 U4.10
Boundary1: P2.3 U3.11 | length 11.2
  Top Layer w0.203: P2.3@152.527,51.816 152.357,51.986 152.357,58.057 155.197,60.897 155.978,60.897 U3.11
Boundary2: P4.3 U3.12 | length 16.3
  Top Layer w0.203: P4.3 144.889,53.129 145.229,53.129 153.706,61.606 U3.12
DOWN: C12.1 SW3.1 U3.2 | length 8.1
  Top Layer w0.203: SW3.1 143.404,64.743 143.752,65.091 145.642,65.091 146.267,65.716 146.267,66.012 146.869,66.613 148.787,66.613 149.2,66.2 150.243,66.2 U3.2
GND: C2.2 C3.2 C4.2 C5.2 C6.2 C7.2 C8.2 C9.2 C10.2 C11.2 C12.2 C13.2 C16.2 D1.2 D2.1 D3.1 P2.1 P4.1 P6.3 pad.4@146.431,99.822 R5.2 SW1.2 SW2.2 SW3.2 SW4.2 U1.2 U2.8 U3.5 U4.8 U4.13 U5.8 | length 21.6
  Top Layer w0.203: 149.278,64.2 U3.5@150.293,64.2
  Top Layer w0.254: SW4.2 136.985,55.88 v1(137.795,55.88) ; SW2.2 136.985,60.325 v1(137.795,60.325) ; SW3.2 136.985,64.77 v1(137.795,64.77) ; SW1.2 136.95,69.088 v1(137.795,69.088) ; C13.2@145.642,55.219 C13.2
  Top Layer w0.508: P6.3 P6.3@142.576,86.659 ; v1(145.2,63.3) 145.383,63.484 145.383,63.882 145.442,63.941 C12.2 ; v1(145.604,54.405) 145.604,55.061 145.662,55.119 C13.2 ; v1(145.669,61.595) 145.669,60.83 145.728,60.772 C7.2 ; v1(145.715,70.48) 145.715,69.803 C6.2 ; D2.1 145.923,79.446 v1(145.923,78.531) ; v1(145.9,86.6) 145.922,86.622 R5.2 ; v1(146.916,63.109) 146.916,63.764 147.005,63.764 C16.2@147.098,63.857 ; v1(147.9,71.5) 148.775,71.5 C9.2 148.859,71.534 148.859,71.651 150.106,72.898 U4.13 U4.13@150.642,72.9 ; D3.1 148.209,78.538 v1(148.216,78.531) ; v1(148.456,63.193) 148.456,63.841 148.505,63.89 148.69,63.89 148.9,64.1 148.9,64.2 149.278,64.2 ; U1.2@151.436,89.5 U1.2 ; v1(154.318,77.982) 155.542,77.982 U4.8
  Top Layer w0.635: C16.2 C16.2@147.093,63.889 ; C16.2@147.074,63.897 C8.2@148.505,63.897
  Top Layer w0.889: v2(162.8,50.3) 163.512,50.3 ; v2(162.935,72.768) 163.647,72.768
  Top Layer w1.27: U2.8@160.909,75.122 U2.8@160.945,75.086
  other v1: 149.987,82.677 149.987,84.455 149.987,86.233 150,93.3 150.85,93.3 144.314,97.9 146.6,97.9 149.02,97.9 143.114,99.01 145.4,99.01 147.82,99.01 149.7,99.01 144.314,100 146.6,100 149.02,100
LEFT: C7.1 SW2.1 U3.7 | length 8.6
  Top Layer w0.203: SW2.1 143.404,60.181 143.752,59.832 145.531,59.832 C7.1 ; C7.1@145.758,59.622 145.842,59.622 146.053,59.832 146.053,59.917 148.943,62.807 149.595,62.807 150.189,62.808 U3.7
NetC1_1: C1.1 D1.1 L1.1 U1.6
  other v1: 155.261,91.852 155.261,92.652
NetC1_2: C1.2 U1.1 | length 2.2
  Top Layer w0.635: v1(150.871,91.13) 150.871,90.935 U1.1@151.371,90.435
  Bottom Layer w0.635: v1(150.871,91.13) 151.199,91.13 151.847,90.482 C1.2
NetD2_2: D2.2 R3.1 | length 1.9
  Top Layer w0.508: D2.2 R3.1
NetD3_2: D3.2 R2.2 | length 1.5
  Top Layer w0.508: D3.2 R2.2
NetJ1_1: J1.1 U2.16 | length 6.9
  Top Layer w1.27: U2.16 171.536,92.964 173.242,91.258 174.708,91.258 J1.1
NetJ1_2: J1.2 U2.15 | length 6.9
  Top Layer w1.27: U2.15 170.676,90.424 172.386,88.714 J1.2@174.717,88.714
NetJ1_4: J1.4 U2.14 | length 8
  Top Layer w1.27: U2.14 169.916,87.884 174.061,83.739 174.727,83.739 J1.4
NetJ1_5: J1.5 U2.13 | length 7.9
  Top Layer w1.27: U2.13 168.573,85.3 169.6,85.3 173.661,81.239 174.727,81.239 J1.5
NetJ2_1: J2.1 U5.16 | length 6.9
  Top Layer w1.27: U5.16 171.409,70.231 173.115,68.525 174.581,68.525 J2.1
NetJ2_2: J2.2 U5.15 | length 6.9
  Top Layer w1.27: U5.15 170.549,67.691 172.259,65.981 J2.2@174.59,65.981
NetJ2_4: J2.4 U5.14 | length 8
  Top Layer w1.27: U5.14 169.789,65.151 173.934,61.006 174.6,61.006 J2.4
NetJ2_5: J2.5 U5.13 | length 7.9
  Top Layer w1.27: U5.13 168.446,62.567 169.473,62.567 173.534,58.506 174.6,58.506 J2.5
NetR1_1: R1.1 R5.1 U1.3 | length 4.1
  Top Layer w0.508: R5.1@148.743,86.627 R5.1
  Top Layer w0.635: R5.1@148.743,86.627 148.82,86.705 148.849,86.705 148.849,87.449 149.29,87.89 149.29,88.186 149.504,88.4 R1.1 149.68,88.53 151.452,88.53 U1.3
NetR4_2: R4.2 U1.4 | length 1.2
  Top Layer w0.635: U1.4 153.934,88.532 154.04,88.426 R4.2@155.041,88.426
NetU2_1: U2.1 U4.7 | length 18.8
  Top Layer w0.254: U4.7 156.083,76.708 157.4,78.025 157.4,89.455 U2.1
NetU2_2: U2.2 U4.6 | length 17.6
  Top Layer w0.254: U4.6 156.158,75.438 156.295,75.575 156.347,75.575 158.1,77.328 158.1,87.615 U2.2
NetU2_3: U2.3 U4.5 | length 16.3
  Top Layer w0.254: U4.5 156.084,74.168 158.9,76.984 158.9,85.875 U2.3
NetU2_4: U2.4 U4.4 | length 14.9
  Top Layer w0.254: U4.4 156.01,72.898 159.639,76.527 159.639,84.074 U2.4
NetU3_14: U3.14 U4.14 | length 12.3
  Top Layer w0.254: U4.14 150.69,71.674 151.632,71.674 152.8,70.506 152.8,64.9 154.794,62.906 U3.14
NetU3_16: U3.16 U4.12 | length 13.5
  Top Layer w0.254: U4.12 150.697,74.116 151.436,74.116 153.5,72.052 153.5,65.3 154.594,64.206 U3.16
NetU3_17: U3.17 U4.11 | length 13.9
  Top Layer w0.254: U4.11 150.697,75.386 151.436,75.386 154.3,72.522 154.3,65.537 154.981,64.856 U3.17
NetU4_1: U4.1 U5.3 | length 7
  Top Layer w0.254: U4.1 155.683,69.225 155.809,69.099 156.58,69.099 160.528,65.151 U5.3
NetU4_2: U4.2 U5.2 | length 6.7
  Top Layer w0.254: U4.2 158.115,70.358 U5.2 U5.2@160.445,67.691
NetU4_3: U4.3 U5.1 | length 5.8
  Top Layer w0.254: U4.3 159.385,71.628 U5.1
NetU4_15: U4.15 U5.4 | length 14.4
  Top Layer w0.508: U4.15 150.648,70.354 151.846,70.354 v1(152.1,70.1)
  Bottom Layer w0.254: v1(152.1,70.1) 155.198,70.1 158.987,66.311 158.987,64.406 U5.4@160.719,62.674
RIGHT: C13.1 SW4.1 U3.8 | length 11.4
  Top Layer w0.203: SW4.1 143.404,55.927 143.746,56.269 145.842,56.269 146.053,56.48 146.053,56.855 147.477,58.28 147.477,60.822 149.007,62.351 150.192,62.351 U3.8
RST: P1.1 U3.6 | length 21.1
  Top Layer w0.305: U3.6 150.309,63.578 151.478,63.578 v1(151.5,63.6)
  Bottom Layer w0.305: P1.1 142.836,78.13 143.27,78.13 146.292,75.108 146.292,67.408 150.1,63.6 v1(151.5,63.6)
RX: P7.1 U3.10 | length 16.7
  Top Layer w0.305: 149.5,60.9 149.508,60.908 150.239,60.908 U3.10
  Top Layer w0.508: v1(149.1,60.8) 149.4,60.8 149.5,60.9
  Bottom Layer w0.305: P7.1 144.3,71.005 144.3,65.1 146.1,63.3 146.1,63 148.3,60.8 v1(149.1,60.8)
SWC: P1.3 U3.19 | length 29.7
  Top Layer w0.305: U3.19 157.416,66.156 157.554,66.294 v1(157.607,66.294)
  Bottom Layer w0.305: P1.3 147.248,78.799 147.248,69.152 150.106,66.294 v1(157.607,66.294)
SWD: P1.2 U3.18 | length 28.2
  Top Layer w0.305: U3.18 157.453,65.506 157.554,65.405 v1(157.607,65.405)
  Bottom Layer w0.305: P1.2 142.352,80.948 146.8,76.5 146.8,68.533 149.928,65.405 v1(157.607,65.405)
TX: P7.2 U3.9 | length 18.1
  Top Layer w0.305: 149.6,61.6 150.281,61.6 U3.9
  Top Layer w0.508: v1(149.133,61.7) 149.233,61.6 149.6,61.6
  Bottom Layer w0.305: P7.2 142.605,75.495 145.137,72.963 145.137,66.063 147.8,63.4 147.8,62.7 148.789,61.711 149.121,61.711 v1(149.133,61.7)
UP: C6.1 SW1.1 U3.1 | length 8
  Top Layer w0.203: SW1.1 143.701,68.837 145.531,68.837 C6.1 145.916,68.8 147.3,68.8 149.294,66.806 U3.1
VCC: C2.1 C3.1 C4.1 C10.1 C11.1 J1.3 J2.3 pad.4@162.56,99.822 R2.1 R4.1 U1.5 U2.9 U5.9 | length 11
  Top Layer w0.508: U5.9@168.212,52.261 U5.9
  Top Layer w0.635: R2.1 148.209,85.119 v1(148.217,85.127)
  Top Layer w0.762: U1.5 154.895,89.482 155.041,89.628 R4.1
  Top Layer w0.889: 165.488,50.3 v2(166.3,50.3) ; 165.622,72.768 v2(166.435,72.768)
  Top Layer w1.27: U2.9@168.493,75.086 U2.9@168.529,75.122
  VCC w0.635: v1(148.217,85.127) 148.39,85.3 154.884,85.3
  other v1: 155.829,82.677 155.829,84.455 155.829,86.233 156.534,89.67 155.518,90.559 156.534,90.559 160.414,97.9 162.7,97.9 165.12,97.9 159.214,99.01 161.5,99.01 163.92,99.01 165.8,99.01 160.414,100 162.7,100 165.12,100
pads on no net: U2.5 U2.6 U2.7 U2.10 U2.11 U2.12 U3.3 U3.13 U3.15 U3.20 U4.9 U5.5 U5.6 U5.7 U5.10 U5.11 U5.12

## Polygon pours and split planes (outlines as drawn)
NetC1_1 on Bottom Layer "NETC1_1_L04_P052" (solid, pour order 52): 154.442,93 155.1,93 155.515,93 155.63,92.885 155.63,91.63 155.5,91.5 155.015,91.5 153.859,90.344 153.859,90.039 153.725,89.906 152.994,89.906 152.87,90.03 152.87,90.865 154.3,92.296 154.3,92.858
GND on Bottom Layer "GND_L04_P053" (solid, pour order 53): 151,91.6 150.6,91.6 149.5,92.7 149.5,93.6 149.7,93.8 151.1,93.8 151.3,93.6 151.3,91.9
3.3V on Top Layer "Top Layer-3.3V" (solid, pour order 47): 149.871,91.172 152.287,91.171 152.367,91.252 152.367,93.033 152.3,93.1 151.3,93.1 151.1,92.9 141.668,92.9 141.322,92.555 141.322,91.031 141.576,90.777 145.894,90.777 147.1,89.831 147.1,88 147.3,87.8 148.4,87.8 148.561,87.961 148.561,89.244 148.561,90.661 149.072,91.172
VCC on Top Layer "Top Layer-VCC" (solid, pour order 32): 153.232,81.415 153.359,81.288 156.28,81.288 156.407,81.415 156.407,86.607 156.915,87.115 156.915,89.416 156.915,90.813 156.661,91.067 154.821,91.067 154.629,90.875 154.629,89.202 154.731,89.1 155.568,89.1 155.702,88.966 155.702,87.867 155.473,87.638 153.359,87.638 153.232,87.511
GND on Top Layer "Top Layer-GND" (solid, pour order 56): 149.479,87.249 149.479,81.521 149.712,81.288 152.248,81.288 152.501,81.54 152.501,87.001 152.9,87.4 152.9,89.644 152.544,90 150.8,90 150.5,90.3 150.5,90.7 150.375,90.825 149.625,90.825 149.479,90.679 149.479,89.821 150.2,89.1 151.8,89.1 152,88.9 152,88.1 151.6,87.7 149.93,87.7 149.86,87.63
NetC1_1 on Top Layer "NETC1_1_L01_P017" (solid, pour order 17): 153,93.022 153.078,93.1 155.454,93.1 155.702,92.852 155.702,91.44 155.575,91.313 154.713,91.313 154.432,91.032 154.432,90.132 154.3,90 153.418,90 153.289,90.129 153.289,90.951 153,91.24
3.3V on VCC "3.3V_L03_P028" (solid, pour order 28): 141.224,90.424 143.383,90.424 144.145,89.662 144.145,83.185 146.558,80.772 150.622,80.772 158.115,73.279 158.115,52.832 154.305,49.022 142.621,49.022 137.16,54.483 137.16,73.152 140.335,76.327 140.335,89.535
VCC on VCC "VCC_L03_P026" (solid, pour order 26): 154.94,102.87 153.924,101.854 153.924,81.28 158.704,76.5 163.276,76.5 165.481,74.295 165.481,49.911 166.37,49.022 169.545,49.022 176.276,55.753 176.276,95.885 169.291,102.87
GND on GND "GND_L02_P025" (solid, pour order 25): 141.732,102.87 140.335,101.473 140.335,76.327 137.16,73.152 137.16,54.483 142.621,49.022 166.878,49.022 170.434,52.578 170.434,71.966 165.9,76.5 158.7,76.5 152.908,82.292 152.908,101.854 151.892,102.87

## Silkscreen, mask and mechanical layers (free items; w line width, h text height)
Top Overlay:
  rectangle: 144.018,88.773 144.907,92.583
  text "VCC" at 168.473,97.923 h1.52 r90
  text "GND" at 152.371,97.729 h1.52 r90
  text "3V3" at 138.735,91.491 h0.76
  text "BUCK" at 145.872,89.459 h0.76 r90
  text "E3V3" at 137.973,88.951 h0.76
  text "GND" at 138.481,86.284 h0.76
  text "SWC" at 138.532,83.044 h0.76
  text "SWD" at 138.532,80.377 h0.76
  text "RST" at 138.532,77.837 h0.76
  text "12V" at 148.666,76.632 h0.76 r90
  text "3V3" at 146.322,75.978 h0.76 r90
  text "TX" at 139.37,75.108 h0.76
  text "RX" at 139.37,72.568 h0.76
  text "UP" at 135.254,69.693 h0.76 r270
  text "DOWN" at 135.254,66.01 h0.76 r270
  text "LEFT" at 135.254,61.565 h0.76 r270
  text "RIGHT" at 135.254,57.501 h0.76 r270
  text "B1" at 152.857,49.2 h0.76 r90
  text "B2" at 143.967,48.946 h0.76 r90
  text "3V3" at 155.397,48.184 h0.76 r90
  text "GND" at 157.937,48.184 h0.76 r90
  text "3V3" at 146.38,48.057 h0.76 r90
  text "GND" at 148.92,48.057 h0.76 r90
Bottom Overlay:
  text "C1" at 152.178,88.278 h0.76